# EAGLE board EBook READER v7 - PCB (EAGLE 9.7.0)
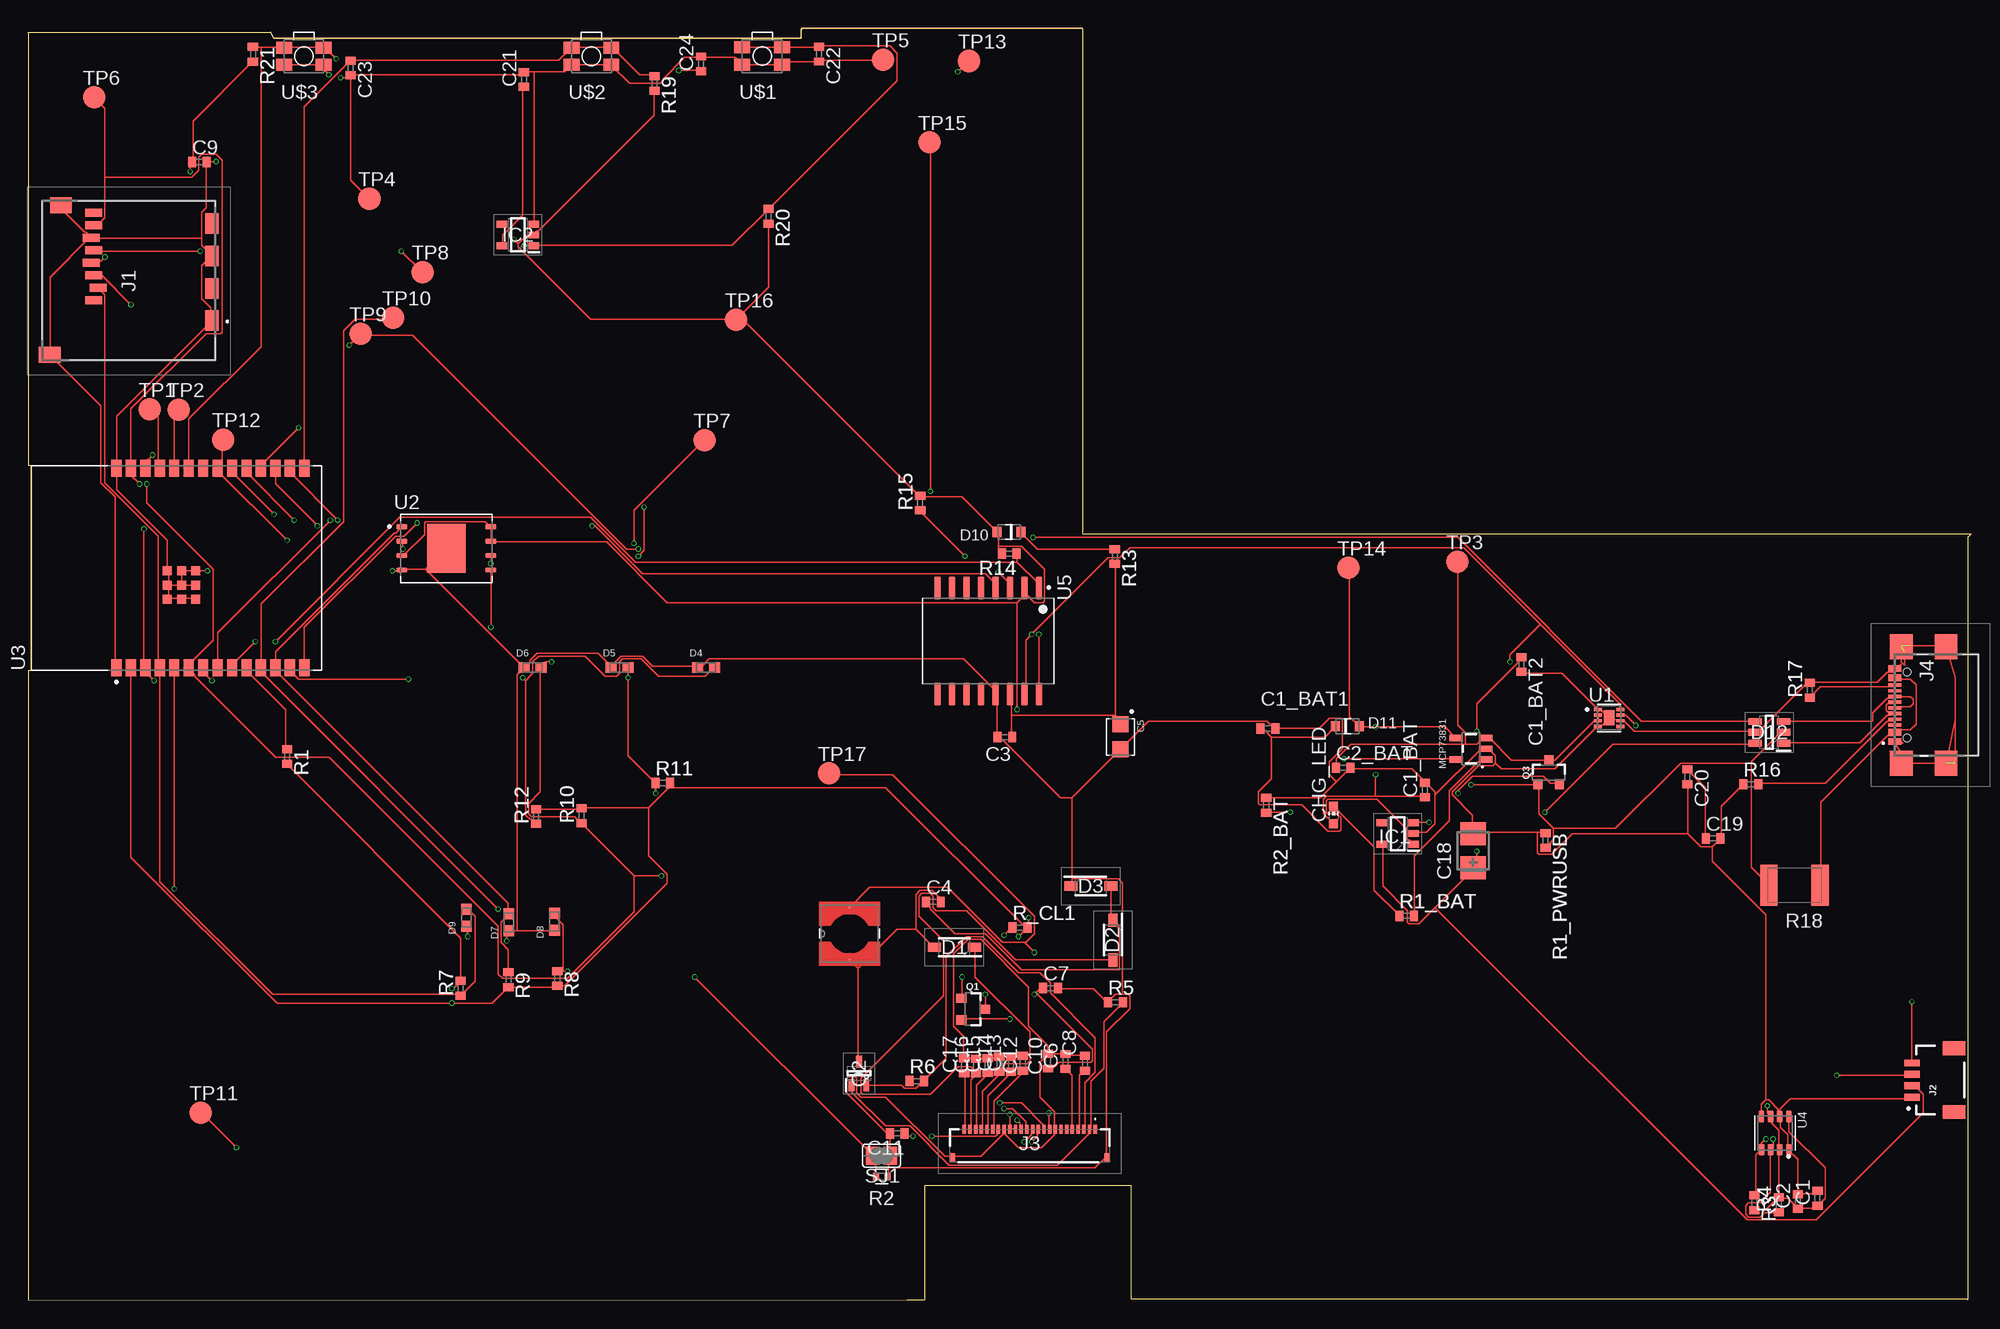
[diagram p0: board, top side]
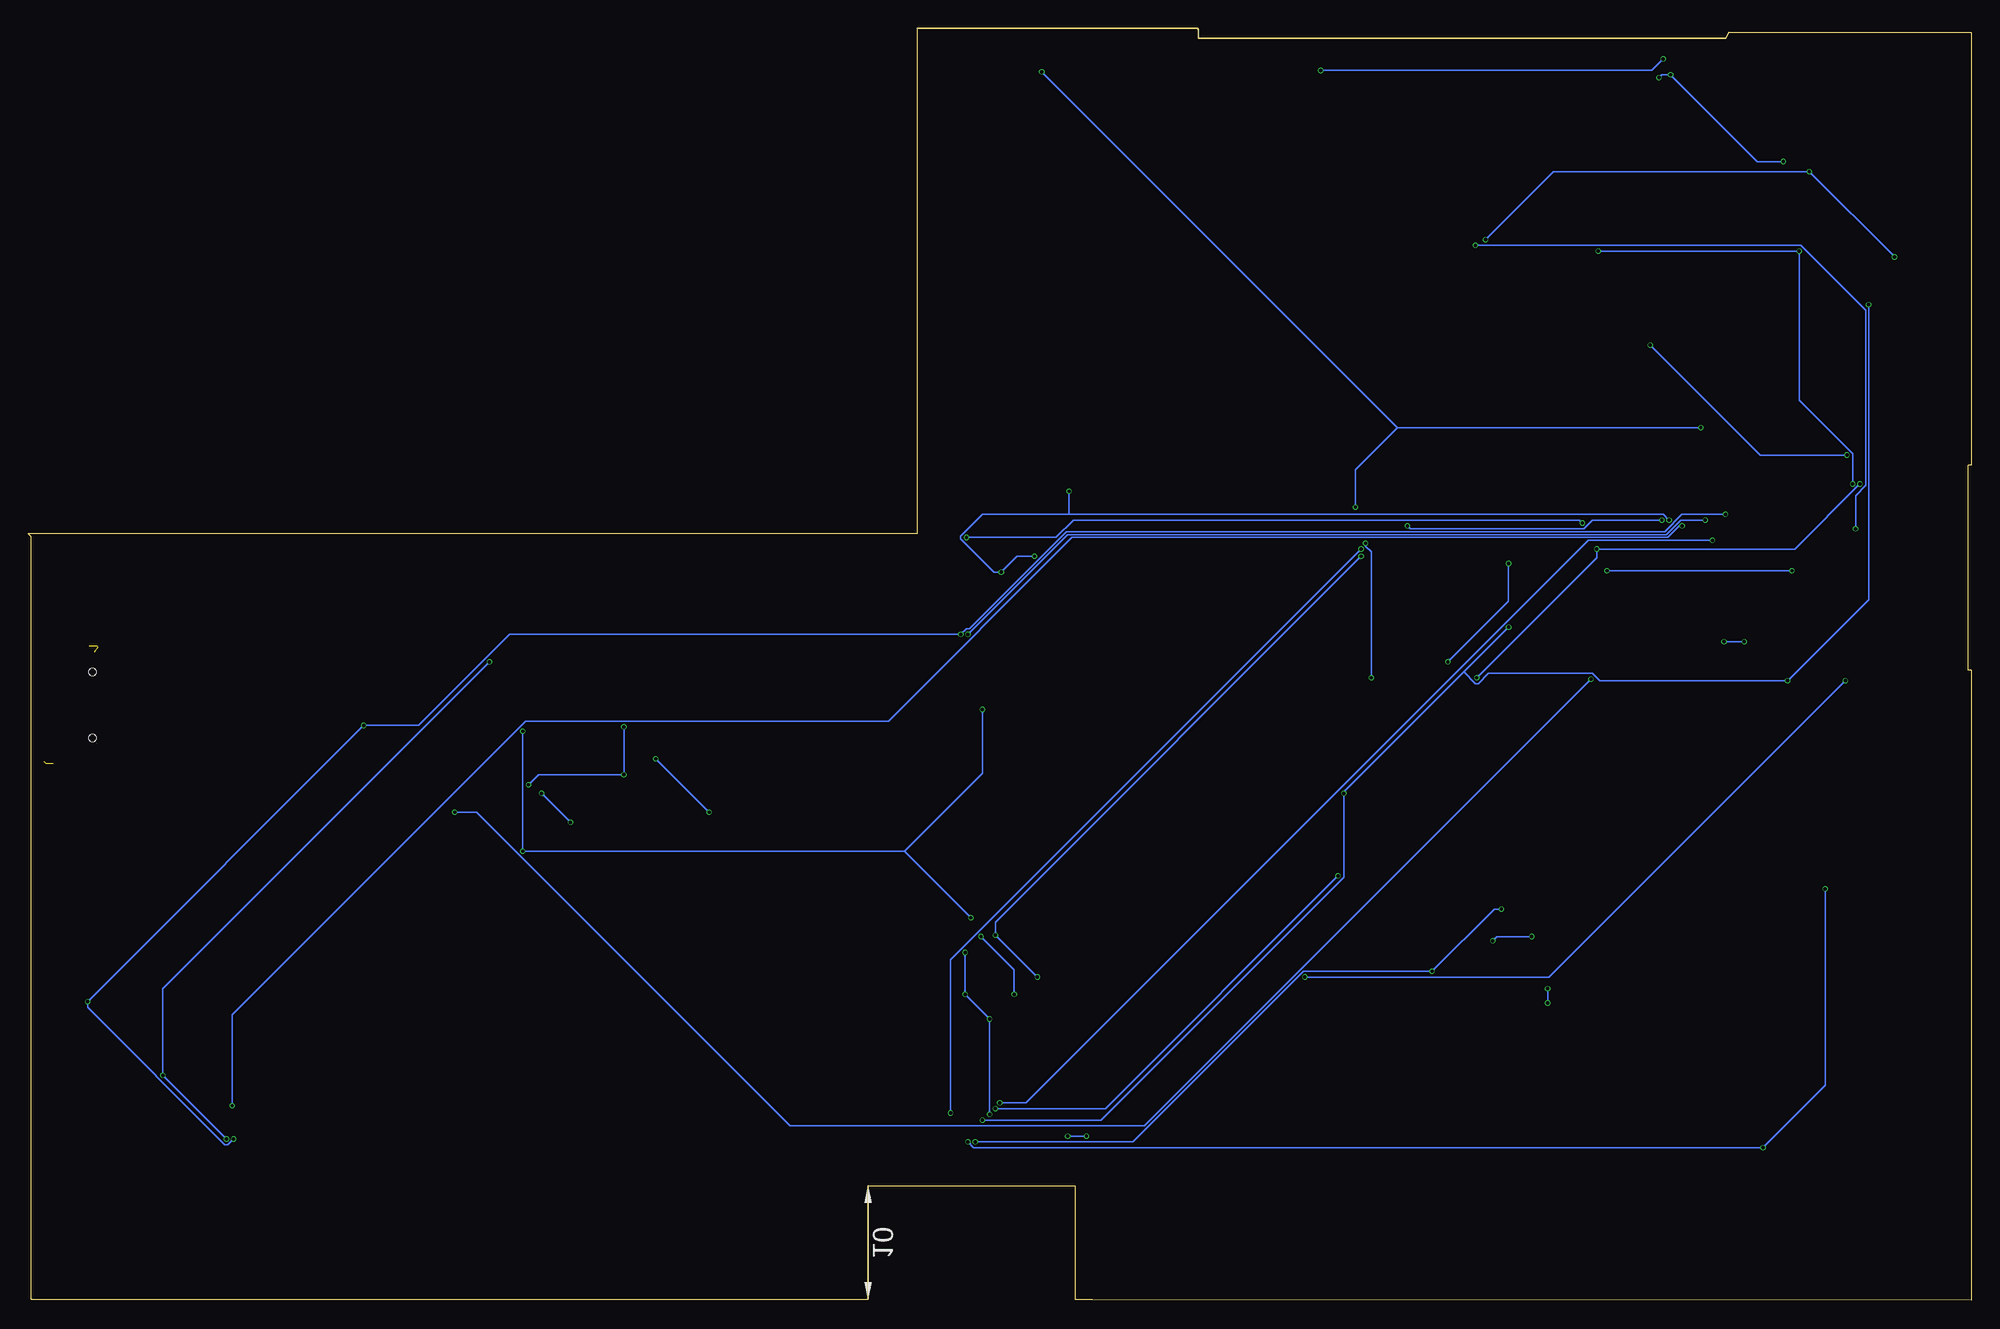
[diagram p1: board, bottom side, seen from below]

Size 170.67 x 111.69 mm. Coordinates in mm from the lower left corner, seen from the top.
Outline: 78.71,0.02 77.2,0.02 0,0 0,55.34 0.26,55.34 0.26,73.32 0,73.32 0,111.32 21.29,111.37 21.56,110.82 67.86,110.82 67.86,111.58 67.97,111.69 92.62,111.69 92.62,67.31 170.67,67.31 170.4,67.05 170.4,0.05
Outline: 170.38,0.03 170.4,0.05
Outline: 170.4,0.05 96.92,0.05 96.92,10.06 78.72,10.06 78.72,0.03
Copper layers (1*16): Top / Bottom
Stack-up Default Layer Stack: Top User Defined 0.035mm / Dielectric-1 User Defined 1.6mm / Bottom User Defined 0.035mm
Design rules: minimum copper width 5mil, minimum drill size 0.3mm, copper clearance wire_polygon to wire_polygon 5mil, copper clearance wire_polygon to pad_smd 5mil, copper clearance wire_polygon to via 5mil, copper clearance pad_smd to pad_smd 5mil, copper clearance pad_smd to via 5mil, copper clearance via to via 5mil, copper clearance smd to pad (same net) 5mil, copper clearance smd to via (same net) 5mil, copper clearance smd to smd (same net) 5mil, dimension clearance 0.2mm, via restrict clearance 0mil, restrict clearance 0mil, drill distance 6mil, keepout clearance 0mil

## Footprints (pad centres in the part's own frame; a part is rotated, then mirrored left to right if it is on the bottom)
ESP32_WROVER_EAGLE-LTSPICE_C0402 = smd 0.7 x 0.9: 1 -0.65,0; 2 0.65,0
EAGLE-LTSPICE_C0402 = smd 0.7 x 0.9: 1 -0.65,0; 2 0.65,0
CAPCP3225X100N = smd 1.4 x 1.4: 1 -1.1,0; 2 1.1,0
RCL_CT3528 = smd 2 x 2.2: + -1.5,0; - 1.5,0
ADAFRUIT_CHIP-LED0603 = smd 0.8 x 0.8: A 0,-0.75; C 0,0.75
SOD3716X135N = smd 1.15 x 0.8: 1 -1.75,0; 2 1.75,0
DIOC1608X36N = smd 0.97 x 0.94: 1 -0.75,0; 2 0.75,0
ESP32_WROVER_AVX---SD0805S020S1R0_AVX_SD0805S020S1R0_0 = smd 0.8 x 0.9: 1 -1.05,0; 2 1.05,0
SOT95P280X145-6N = smd 1.2 x 0.6: 1 -1.25,0.95; 2 -1.25,0; 3 -1.25,-0.95; 4 1.25,-0.95; 5 1.25,0; 6 1.25,0.95
SOT95P280X120-5N = smd 0.9 x 0.6: 1 -1.4,0.95; 2 -1.4,0; 3 -1.4,-0.95; 4 1.4,-0.95; 5 1.4,0.95
SOT95P280X125-5N = smd 0.9 x 0.6: 1 -1.4,0.95; 2 -1.4,0; 3 -1.4,-0.95; 4 1.4,-0.95; 5 1.4,0.95
112ATAARR03ATTEND = smd 1.8 x 1.2: G1 10.6,10.4; G2 4.9,10.4; S1 7.75,10.4; S2 2.05,10.4 | smd 1.4 x 1.9: G3 13.6,-3.85; G4 0.45,-2.85 | smd 0.7 x 1.5: P1 8.8,0; P2 7.7,0.4; P3 6.6,0; P4 5.5,-0.2; P5 4.4,0; P6 3.3,-0.2; P7 2.2,0; P8 1.1,0
JST04_1MM_RA = smd 0.6 x 1.35: 1 -1.5,0; 2 -0.5,0; 3 0.5,0; 4 1.5,0 | smd 1.2 x 2: NC1 2.8,-3.675; NC2 -2.8,-3.675
FH34SRJ24S05SH99 = smd 0.3 x 0.8: 1 5.75,1.45; 2 5.25,1.45; 3 4.75,1.45; 4 4.25,1.45; 5 3.75,1.45; 6 3.25,1.45; 7 2.75,1.45; 8 2.25,1.45; 9 1.75,1.45; 10 1.25,1.45; 11 0.75,1.45; 12 0.25,1.45; 13 -0.25,1.45; 14 -0.75,1.45; 15 -1.25,1.45; 16 -1.75,1.45; 17 -2.25,1.45; 18 -2.75,1.45; 19 -3.25,1.45; 20 -3.75,1.45; 21 -4.25,1.45; 22 -4.75,1.45; 23 -5.25,1.45; 24 -5.75,1.45 | smd 0.4 x 0.8: MP1 6.75,-1.05; MP2 -6.75,-1.05
SAMACSYS_PARTS_USB4110GFA = smd 0.3 x 1.15: A1 -3.35,3.678; A4 -2.55,3.678; A5 -1.25,3.678; A6 -0.25,3.678; A7 0.25,3.678; A8 1.25,3.678; A9 2.55,3.678; A12 3.35,3.678; B1 3.05,3.678; B4 2.25,3.678; B5 1.75,3.678; B6 0.75,3.678; B7 -0.75,3.678; B8 -1.75,3.678; B9 -2.25,3.678; B12 -3.05,3.678 | smd 2.18 x 2: MP1 -5.11,-0.827; MP2 5.11,-0.827; MP3 -5.11,3.103; MP4 5.11,3.103 | hole 0.65: -2.89,2.603; 2.89,2.603
IND_4828-WE-TPC_WRE = smd 0.127 x 0.127: 1 -2.286,0; 2 2.286,0
ESP32_WROVER_SPARKFUN-IC-POWER_SOT23-5 = smd 0.55 x 1.2: 1 -0.95,-1.3; 2 0,-1.3; 3 0.95,-1.3; 4 0.95,1.3; 5 -0.95,1.3
ESP32_WROVER_SPARKFUN-DISCRETESEMI_SOT23-3 = smd 0.8 x 0.9: 1 -0.95,-1; 2 0.95,-1; 3 0,1.1
SOT65P210X110-3N = smd 1.05 x 0.5: 1 -1.05,0.65; 2 -1.05,-0.65; 3 1.05,0
ESP32_WROVER_EAGLE-LTSPICE_R0402 = smd 0.7 x 0.9: 1 -0.65,0; 2 0.65,0
RESC1005X40 = smd 0.535 x 0.644: 1 -0.507,0; 2 0.507,0
ESP32C6_VARISTOR_CT/CN1812 = smd 1.5 x 3.6: 1 -2.25,0; 2 2.25,0
SJ = smd 1.168 x 1.6: 1 -0.762,0; 2 0.762,0
TP20R = smd 2 x 2: TP 0,0
SON50P200X200X80-9N = smd 0.76 x 0.27: 1 -0.985,0.75; 2 -0.985,0.25; 3 -0.985,-0.25; 4 -0.985,-0.75; 5 0.985,-0.75; 6 0.985,-0.25; 7 0.985,0.25; 8 0.985,0.75 | smd 0.9 x 1.3: 9 0,0
SON127P600X800X80-9N = smd 0.94 x 0.44: 1 -3.895,1.905; 2 -3.895,0.635; 3 -3.895,-0.635; 4 -3.895,-1.905; 5 3.895,-1.905; 6 3.895,-0.635; 7 3.895,0.635; 8 3.895,1.905 | smd 3.4 x 4.3: 9 0,0
XCVR_ESP32-C6-WROOM-1-N8 = smd 1.5 x 0.9: 1 -8.75,5.26; 2 -8.75,3.99; 3 -8.75,2.72; 4 -8.75,1.45; 5 -8.75,0.18; 6 -8.75,-1.09; 7 -8.75,-2.36; 8 -8.75,-3.63; 9 -8.75,-4.9; 10 -8.75,-6.17; 11 -8.75,-7.44; 12 -8.75,-8.71; 13 -8.75,-9.98; 14 -8.75,-11.25; 15 8.75,-11.25; 16 8.75,-9.98; 17 8.75,-8.71; 18 8.75,-7.44; 19 8.75,-6.17; 20 8.75,-4.9; 21 8.75,-3.63; 22 8.75,-2.36; 23 8.75,-1.09; 24 8.75,0.18; 25 8.75,1.45; 26 8.75,2.72; 27 8.75,3.99; 28 8.75,5.26 | smd 0.8 x 0.8: 29_1 -2.755,0.79; 29_2 -1.505,0.79; 29_3 -0.255,0.79; 29_4 -2.755,-0.46; 29_5 -1.505,-0.46; 29_6 -0.255,-0.46; 29_7 -2.755,-1.71; 29_8 -1.505,-1.71; 29_9 -0.255,-1.71
ESP32_WROVER_BME680_PSON80P300X300X100-8N = smd 1.016 x 0.5: 1 1.458,1.2; 2 1.458,0.4; 3 1.458,-0.4; 4 1.458,-1.2; 5 -1.458,-1.22; 6 -1.458,-0.4; 7 -1.458,0.4; 8 -1.458,1.2
SOIC127P1032X265-16N = smd 2.05 x 0.59: 1 -4.655,4.445; 2 -4.655,3.175; 3 -4.655,1.905; 4 -4.655,0.635; 5 -4.655,-0.635; 6 -4.655,-1.905; 7 -4.655,-3.175; 8 -4.655,-4.445; 9 4.655,-4.445; 10 4.655,-3.175; 11 4.655,-1.905; 12 4.655,-0.635; 13 4.655,0.635; 14 4.655,1.905; 15 4.655,3.175; 16 4.655,4.445
MYBUTTON = smd 1.4 x 1.05: 1 1.75,0.75; 2 -1.75,0.75; 3 -1.75,-0.75; 4 1.75,-0.75

## Placement (x,y rotation side)
C1  [ESP32_WROVER_EAGLE-LTSPICE_C0402]  157.18,8.95 90 top
C1_BAT  4.7uF  [ESP32_WROVER_EAGLE-LTSPICE_C0402]  122.69,44.8 90 top
C1_BAT1  4.7uF  [ESP32_WROVER_EAGLE-LTSPICE_C0402]  108.89,50.2 0 top
C1_BAT2  4.7uF  [ESP32_WROVER_EAGLE-LTSPICE_C0402]  131.16,55.82 270 top
C2  [ESP32_WROVER_EAGLE-LTSPICE_C0402]  155.45,8.66 90 top
C2_BAT  4.7uF  [ESP32_WROVER_EAGLE-LTSPICE_C0402]  115.51,46.76 0 top
C3  [EAGLE-LTSPICE_C0402]  85.78,49.45 180 top
C4  4.7uF/25V  [EAGLE-LTSPICE_C0402]  79.5,34.97 0 top
C5  CPH3225A  [CAPCP3225X100N]  95.94,49.46 270 top
C6  1uF/50V  [ESP32_WROVER_EAGLE-LTSPICE_C0402]  91.1,20.96 90 top
C7  10uF  [EAGLE-LTSPICE_C0402]  89.79,27.4 0 top
C8  1uF/50V  [ESP32_WROVER_EAGLE-LTSPICE_C0402]  92.81,20.81 90 top
C9  100nF  [EAGLE-LTSPICE_C0402]  15.02,99.96 0 top
C10  0.1uF/50V  [ESP32_WROVER_EAGLE-LTSPICE_C0402]  89.57,20.99 90 top
C11  1uF/50V  [ESP32_WROVER_EAGLE-LTSPICE_C0402]  76.33,14.64 180 top
C12  1uF/50V  [ESP32_WROVER_EAGLE-LTSPICE_C0402]  87.35,20.81 90 top
C13  1uF/50V  [ESP32_WROVER_EAGLE-LTSPICE_C0402]  86.32,20.7 90 top
C14  1uF/50V  [ESP32_WROVER_EAGLE-LTSPICE_C0402]  85.3,20.72 90 top
C15  1uF/50V  [ESP32_WROVER_EAGLE-LTSPICE_C0402]  84.27,20.61 90 top
C16  1uF/50V  [ESP32_WROVER_EAGLE-LTSPICE_C0402]  83.24,20.56 90 top
C17  1uF/50V  [ESP32_WROVER_EAGLE-LTSPICE_C0402]  82.22,20.58 90 top
C18  100uF  [RCL_CT3528]  126.92,39.46 90 top
C19  100nF  [ESP32_WROVER_EAGLE-LTSPICE_C0402]  148.01,40.55 0 top
C20  4.7uF  [ESP32_WROVER_EAGLE-LTSPICE_C0402]  145.75,45.96 270 top
C21  100nF  [ESP32_WROVER_EAGLE-LTSPICE_C0402]  43.53,107.2 90 top
C22  1uF  [ESP32_WROVER_EAGLE-LTSPICE_C0402]  69.45,109.44 270 top
C23  100nF  [ESP32_WROVER_EAGLE-LTSPICE_C0402]  28.3,108.22 270 top
C24  100nF  [ESP32_WROVER_EAGLE-LTSPICE_C0402]  59.08,108.58 90 top
CHG_LED  [ADAFRUIT_CHIP-LED0603]  114.66,42.6 0 top
D1  MBR0530  [SOD3716X135N]  81.35,30.99 180 top
D2  MBR0530  [SOD3716X135N]  95.27,31.62 270 top
D3  MBR0530  [SOD3716X135N]  93.34,36.36 0 top
D4  PGB1010603MR  [DIOC1608X36N]  59.54,55.57 0 top
D5  PGB1010603MR  [DIOC1608X36N]  51.92,55.57 0 top
D6  PGB1010603MR  [DIOC1608X36N]  44.3,55.57 0 top
D7  PGB1010603MR  [DIOC1608X36N]  42.2,33.17 90 top
D8  PGB1010603MR  [DIOC1608X36N]  46.22,33.22 90 top
D9  PGB1010603MR  [DIOC1608X36N]  38.48,33.6 90 top
D10  ESP32_WROVER_AVX---SD0805S020S1R0_AVX_SD0805S020S1R0_0_0AVX_SD0805S020S1R0_0_0  [ESP32_WROVER_AVX---SD0805S020S1R0_AVX_SD0805S020S1R0_0]  86.16,67.47 180 top
D11  ESP32_WROVER_AVX---SD0805S020S1R0_AVX_SD0805S020S1R0_0_0AVX_SD0805S020S1R0_0_0  [ESP32_WROVER_AVX---SD0805S020S1R0_AVX_SD0805S020S1R0_0]  115.88,50.41 0 top
D12  USBLC6-2SC6Y  [SOT95P280X145-6N]  152.94,49.87 180 top
IC1  XC6220A331MR-G  [SOT95P280X120-5N]  120.29,40.97 180 top
IC2  BD5229G-TR  [SOT95P280X125-5N]  42.99,93.55 180 top
J1  112A-TAAR-R03_ATTEND  [112ATAARR03ATTEND]  5.72,96.62 270 top
J2  QWIIC_RIGHT_ANGLE  [JST04_1MM_RA]  165.49,19.32 90 top
J3  FH34SRJ-24S-0.5SH_99_  [FH34SRJ24S05SH99]  87.97,13.55 0 top
J4  SAMACSYS_PARTS_USB4110-GF-A  [SAMACSYS_PARTS_USB4110GFA]  167.64,52.27 90 top
L1  68uH  [IND_4828-WE-TPC_WRE]  72.14,32.18 90 top
MCP73831  ESP32_WROVER_SPARKFUN-IC-POWER_MCP73831  [ESP32_WROVER_SPARKFUN-IC-POWER_SOT23-5]  126.73,48.42 90 top
Q1  20V/4.2A/52mΩ/1.4W  [ESP32_WROVER_SPARKFUN-DISCRETESEMI_SOT23-3]  82.94,25.55 270 top
Q2  SI1308EDL-T1-GE3  [SOT65P210X110-3N]  72.97,19.9 90 top
Q3  20V/4.2A/52mΩ/1.4W  [ESP32_WROVER_SPARKFUN-DISCRETESEMI_SOT23-3]  133.56,46.32 0 top
R1  [ESP32_WROVER_EAGLE-LTSPICE_R0402]  22.72,47.74 270 top
R1_BAT  200  [ESP32_WROVER_EAGLE-LTSPICE_R0402]  121.08,33.74 0 top
R1_PWRUSB  100K  [ESP32_WROVER_EAGLE-LTSPICE_R0402]  133.28,40.37 270 top
R2  2.2  [RESC1005X40]  74.95,10.84 180 top
R2_BAT  2K  [ESP32_WROVER_EAGLE-LTSPICE_R0402]  108.74,43.47 270 top
R3  [ESP32_WROVER_EAGLE-LTSPICE_R0402]  151.63,8.54 270 top
R4  [ESP32_WROVER_EAGLE-LTSPICE_R0402]  153.77,8.37 90 top
R5  10K  [ESP32_WROVER_EAGLE-LTSPICE_R0402]  95.5,26.15 0 top
R6  0.47  [ESP32_WROVER_EAGLE-LTSPICE_R0402]  78.05,19.24 0 top
R7  10K  [ESP32_WROVER_EAGLE-LTSPICE_R0402]  37.98,27.38 90 top
R8  10K  [ESP32_WROVER_EAGLE-LTSPICE_R0402]  46.47,28.24 270 top
R9  10K  [ESP32_WROVER_EAGLE-LTSPICE_R0402]  42.17,28.14 270 top
R10  10K  [ESP32_WROVER_EAGLE-LTSPICE_R0402]  48.6,42.53 90 top
R11  10K  [ESP32_WROVER_EAGLE-LTSPICE_R0402]  55.73,45.41 0 top
R12  10K  [ESP32_WROVER_EAGLE-LTSPICE_R0402]  44.61,42.48 90 top
R13  [ESP32_WROVER_EAGLE-LTSPICE_R0402]  95.44,65.31 270 top
R14  [ESP32_WROVER_EAGLE-LTSPICE_R0402]  86.16,65.56 180 top
R15  [ESP32_WROVER_EAGLE-LTSPICE_R0402]  78.34,70 90 top
R16  5k1  [ESP32_WROVER_EAGLE-LTSPICE_R0402]  151.31,45.3 0 top
R17  5k1  [ESP32_WROVER_EAGLE-LTSPICE_R0402]  156.5,53.57 90 top
R18  ESP32C6_VARISTORCN1812  [ESP32C6_VARISTOR_CT/CN1812]  155.15,36.44 180 top
R19  10K  [ESP32_WROVER_EAGLE-LTSPICE_R0402]  55,106.86 270 top
R20  10K  [ESP32_WROVER_EAGLE-LTSPICE_R0402]  65.01,95.19 270 top
R21  10K  [ESP32_WROVER_EAGLE-LTSPICE_R0402]  19.73,109.43 270 top
R_CL1  10K  [ESP32_WROVER_EAGLE-LTSPICE_R0402]  87.1,32.71 0 top
SJ1  [SJ]  74.94,12.69 180 top
TP1  TPTP20R  [TP20R]  10.66,78.23 0 top
TP2  TPTP20R  [TP20R]  13.18,78.22 0 top
TP3  TPTP20R  [TP20R]  125.53,64.85 0 top
TP4  TPTP20R  [TP20R]  29.95,96.74 0 top
TP5  TPTP20R  [TP20R]  75.1,108.94 0 top
TP6  TPTP20R  [TP20R]  5.77,105.64 0 top
TP7  TPTP20R  [TP20R]  59.41,75.53 0 top
TP8  TPTP20R  [TP20R]  34.65,90.3 0 top
TP9  TPTP20R  [TP20R]  29.18,84.87 0 top
TP10  TPTP20R  [TP20R]  32.05,86.28 0 top
TP11  TPTP20R  [TP20R]  15.13,16.47 0 top
TP12  TPTP20R  [TP20R]  17.11,75.58 0 top
TP13  TPTP20R  [TP20R]  82.64,108.83 0 top
TP14  TPTP20R  [TP20R]  115.98,64.31 0 top
TP15  TPTP20R  [TP20R]  79.15,101.68 0 top
TP16  TPTP20R  [TP20R]  62.16,86.09 0 top
TP17  TPTP20R  [TP20R]  70.33,46.26 0 top
U1  MAX17048G+T10  [SON50P200X200X80-9N]  138.87,51.13 0 top
U2  W25Q512JVEIQ  [SON127P600X800X80-9N]  36.72,66.02 0 top
U3  ESP32-C6-WROOM-1-N8  [XCVR_ESP32-C6-WROOM-1-N8]  12.99,64.3 90 top
U4  ESP32_WROVER_BME680_BME680  [ESP32_WROVER_BME680_PSON80P300X300X100-8N]  153.45,14.67 270 top
U5  DS3231SN#  [SOIC127P1032X265-16N]  84.33,57.88 270 top
U$1  BUTTON_CUSYOMV1  [MYBUTTON]  64.46,109.27 180 top
U$2  BUTTON_CUSYOMV1  [MYBUTTON]  49.46,109.26 180 top
U$3  BUTTON_CUSYOMV1  [MYBUTTON]  24.2,109.26 180 top

## Library data of the parts
C1 C1_BAT C1_BAT1 C1_BAT2 C2 C2_BAT C3 C4 C6-C17 C19-C24 = DeskAssistant v19 v1; SPICEMODEL: NONE; SPICEPREFIX: C
C5 = DeskAssistant v19 v1; AVAILABILITY: Not in stock; CHECK_PRICES: https://www.snapeda.com/parts/CPH3225A/Seiko+Instruments/view-part/?ref=eda; DESCRIPTION: 11 mF (EDLC) Supercapacitor 3.3 V 1210 (3225 Metric) - -; MF: Seiko Instruments; MP: CPH3225A; PACKAGE: 1210 Seiko; PRICE: None; PURCHASE-URL: https://www.snapeda.com/api/url_track_click_mouser/?unipart_id=562593&manufacturer=Seiko Instruments&part_name=CPH3225A&search_term=None; SNAPEDA_LINK: https://www.snapeda.com/parts/CPH3225A/Seiko+Instruments/view-part/?ref=snap
C18 = DeskAssistant v19 v1; SPICEPREFIX: C
CHG_LED R18 TP1-TP17 U$1-U$3 = DeskAssistant v19 v1
D1-D3 = DeskAssistant v19 v1; AVAILABILITY: In Stock; CHECK_PRICES: https://www.snapeda.com/parts/MBR0530/Onsemi/view-part/?ref=eda; DESCRIPTION: Diode Schottky 30 V 500mA Surface Mount SOD-123; MF: ON Semiconductor; MP: MBR0530; PACKAGE: SOD-123-2 ON Semiconductor; PRICE: None; PURCHASE-URL: https://www.snapeda.com/api/url_track_click_mouser/?unipart_id=179458&manufacturer=ON Semiconductor&part_name=MBR0530&search_term=None; SNAPEDA_LINK: https://www.snapeda.com/parts/MBR0530/Onsemi/view-part/?ref=snap
D4-D9 = DeskAssistant v19 v1; AVAILABILITY: In Stock; CHECK_PRICES: https://www.snapeda.com/parts/PGB1010603MR/Littelfuse/view-part/?ref=eda; DESCRIPTION: 150V (Typ) Clamp - Ipp Tvs Diode Surface Mount 0603 (1608 Metric); MF: Littelfuse Inc.; MP: PGB1010603MR; PACKAGE: 0603 Littelfuse Inc.; PRICE: None; PURCHASE-URL: https://www.snapeda.com/api/url_track_click_mouser/?unipart_id=5659453&manufacturer=Littelfuse Inc.&part_name=PGB1010603MR&search_term=None; SNAPEDA_LINK: https://www.snapeda.com/parts/PGB1010603MR/Littelfuse/view-part/?ref=snap
D10 D11 = DeskAssistant v19 v1; CENTROID_NOT_SPECIFIED: No; DATASHEET: http://datasheets.avx.com/schottky.pdf; DIGIKEY_DESCRIPTION: DIODE SCHOTTKY 20V 1A 0805; DIGIKEY_PART_NUMBER: 478-7800-1-ND; LEAD_FREE: yes; MF: AVX; MOUSER_PART_NUMBER: 581-SD0805S020S1R0; PACKAGE: 0805 (2012 metric); PREFIX: D; ROHS: yes; TEMPERATURE_RANGE_HIGH: +125°C; TEMPERATURE_RANGE_LOW: -55°C
D12 = DeskAssistant v19 v1; AVAILABILITY: In Stock; CHECK_PRICES: https://www.snapeda.com/parts/USBLC6-2SC6Y/STMicroelectronics/view-part/?ref=eda; DESCRIPTION: 17V Clamp 5A (8/20µs) Ipp Tvs Diode Surface Mount SOT-23-6; MF: STMicroelectronics; MP: USBLC6-2SC6Y; PACKAGE: SOT-23-6 STMicroelectronics; PRICE: None; SNAPEDA_LINK: https://www.snapeda.com/parts/USBLC6-2SC6Y/STMicroelectronics/view-part/?ref=snap
IC1 = DeskAssistant v19 v1; DESCRIPTION: LDO Voltage Regulators; HEIGHT: 1.2mm; MANUFACTURER_NAME: Torex; MANUFACTURER_PART_NUMBER: XC6220A331MR-G; MOUSER_PART_NUMBER: 865-XC6220A331MR-G; MOUSER_PRICE-STOCK: https://www.mouser.co.uk/ProductDetail/Torex-Semiconductor/XC6220A331MR-G?qs=AsjdqWjXhJ8ZSWznL1J0gg%3D%3D
IC2 = DeskAssistant v19 v1; DESCRIPTION: Voltage Detector with Adjustable Delay Time: CMOS processes are utilized to develop high precision, low current consumption CMOS reset ICs that allow arbitrary setting of the delay time. The extensive lineup includes both Nch Open Drain and CMOS output types in a wide range of detection voltages (from 2.3V to 6.0V, in 0.1V steps), enabling selection of the ideal solution based on customer requirements. In addition, the entire series is of course both lead-free and RoHS-compliant.; HEIGHT: 1.25mm; MANUFACTURER_NAME: ROHM Semiconductor; MANUFACTURER_PART_NUMBER: BD5229G-TR; MOUSER_PART_NUMBER: 755-BD5229G-TR; MOUSER_PRICE-STOCK: https://www.mouser.co.uk/ProductDetail/ROHM-Semiconductor/BD5229G-TR?qs=4kLU8WoGk0vvnhrrYwdszw%3D%3D
J1 = DeskAssistant v19 v1; DESCRIPTION: Micro SD Card Socket, Push-Push Type, Top Mount, SMT, H=1.83mm, 10u; HEIGHT: 1.9mm; MANUFACTURER_NAME: ATTEND; MANUFACTURER_PART_NUMBER: 112A-TAAR-R03 ATTEND
J2 = DeskAssistant v19 v1; PROD_ID: CONN-13694
J3 = DeskAssistant v19 v1; DESCRIPTION: 24 Position FFC, FPC Connector Contacts, Top and Bottom 0.020" (0.50mm) Surface Mount, Right Angle; HEIGHT: 1.1mm; MANUFACTURER_NAME: Hirose; MANUFACTURER_PART_NUMBER: FH34SRJ-24S-0.5SH(99); MOUSER_PART_NUMBER: 798-FH34SRJ24S05SH99; MOUSER_PRICE-STOCK: https://www.mouser.co.uk/ProductDetail/Hirose-Connector/FH34SRJ-24S-0.5SH99?qs=vcbW%252B4%252BSTIpKBl5ap9J8Fw%3D%3D
J4 = DeskAssistant v19 v1; DESCRIPTION: CONN USB 2.0 TYPE-C R/A SMT; HEIGHT: 3.26mm; MANUFACTURER_NAME: GCT (GLOBAL CONNECTOR TECHNOLOGY); MANUFACTURER_PART_NUMBER: USB4110-GF-A; MOUSER_PART_NUMBER: 640-USB4110-GF-A; MOUSER_PRICE-STOCK: https://www.mouser.co.uk/ProductDetail/GCT/USB4110-GF-A?qs=KUoIvG%2F9IlYiZvIXQjyJeA%3D%3D
L1 = DeskAssistant v19 v1; COPYRIGHT: Copyright (C) 2024 Ultra Librarian. All rights reserved.; MANUFACTURER_PART_NUMBER: 744043680; MFR_NAME: Wurth Electronics
MCP73831 = DeskAssistant v19 v1; PROD_ID: IC-09995
Q1 Q3 = DeskAssistant v19 v1; PROD_ID: TRAN-14388
Q2 = DeskAssistant v19 v1; AVAILABILITY: In Stock; CHECK_PRICES: https://www.snapeda.com/parts/SI1308EDL-T1-GE3/Vishay+Siliconix/view-part/?ref=eda; DESCRIPTION: Si1308EDL-T1-GE3 N-channel MOSFET Transistor, 1.5 A, 30 V, 3-Pin SC-70 | Siliconix / Vishay SI1308EDL-T1-GE3; MF: Vishay Siliconix; MP: SI1308EDL-T1-GE3; PACKAGE: SOT-323 Vishay Semiconductor; PRICE: None; PURCHASE-URL: https://www.snapeda.com/api/url_track_click_mouser/?unipart_id=274603&manufacturer=Vishay Siliconix&part_name=SI1308EDL-T1-GE3&search_term=None; SNAPEDA_LINK: https://www.snapeda.com/parts/SI1308EDL-T1-GE3/Vishay+Siliconix/view-part/?ref=snap
R1 R1_BAT R1_PWRUSB R2_BAT R3-R17 R19-R21 R_CL1 = DeskAssistant v19 v1; SPICEMODEL: NONE; SPICEPREFIX: R
R2 = Resistor; CATEGORY: Resistors; DESCRIPTION: Chip Resistor 1.05 X 0.54 X 0.40 mm body 0402(1005-METRIC) Package; PACKAGE_SIZE: 0402; PACKAGE_TYPE: SMD
SJ1 = jumper
U1 = DeskAssistant v19 v1; AVAILABILITY: In Stock; CHECK_PRICES: https://www.snapeda.com/parts/MAX17048G+T10/Analog+Devices/view-part/?ref=eda; DESCRIPTION: 3µA 1-Cell/2-Cell Fuel Gauge with ModelGauge; MF: Analog Devices; MP: MAX17048G+T10; PACKAGE: TDFN-8 Maxim; PRICE: None; PURCHASE-URL: https://www.snapeda.com/api/url_track_click_mouser/?unipart_id=329239&manufacturer=Analog Devices&part_name=MAX17048G+T10&search_term=None; SNAPEDA_LINK: https://www.snapeda.com/parts/MAX17048G+T10/Analog+Devices/view-part/?ref=snap
U2 = DeskAssistant v19 v1; AVAILABILITY: In Stock; CHECK_PRICES: https://www.snapeda.com/parts/W25Q512JVEIQ/Winbond+Electronics/view-part/?ref=eda; DESCRIPTION: FLASH - NOR Memory IC 512Mb (64M x 8) SPI - Quad I/O 133 MHz 8-WSON (8x6); MF: Winbond Electronics; MP: W25Q512JVEIQ; PACKAGE: Package; PRICE: None; SNAPEDA_LINK: https://www.snapeda.com/parts/W25Q512JVEIQ/Winbond+Electronics/view-part/?ref=snap
U3 = DeskAssistant v19 v1; AVAILABILITY: In Stock; CHECK_PRICES: https://www.snapeda.com/parts/ESP32-C6-WROOM-1-N8/Espressif+Systems/view-part/?ref=eda; DESCRIPTION: Multiprotocol Modules ESP32-C6 module, Wi-Fi 6 in 2.4 GHz band, Bluetooth 5, Zigbee 3.0 and Thread. ESP34-WROOM Compatible - ENGINEERING SAMPLE; MF: Espressif Systems; MP: ESP32-C6-WROOM-1-N8; PACKAGE: None; PRICE: None; SNAPEDA_LINK: https://www.snapeda.com/parts/ESP32-C6-WROOM-1-N8/Espressif+Systems/view-part/?ref=snap
U4 = DeskAssistant v19 v1; AVAILABILITY: Unavailable; DESCRIPTION: Integrated Environmental Unit; MF: Bosch Sensortec; MP: BME680; PACKAGE: LGA-8 Bosch Tools; PRICE: None
U5 = DeskAssistant v19 v1; AVAILABILITY: In Stock; CHECK_PRICES: https://www.snapeda.com/parts/DS3231SN%23/Analog+Devices/view-part/?ref=eda; DESCRIPTION: Extremely Accurate I²C-Integrated RTC/TCXO/Crystal; MF: Analog Devices; MP: DS3231SN#; PACKAGE: SOIC-16 Maxim; PRICE: None; PURCHASE-URL: https://www.snapeda.com/api/url_track_click_mouser/?unipart_id=99048&manufacturer=Analog Devices&part_name=DS3231SN#&search_term=None; SNAPEDA_LINK: https://www.snapeda.com/parts/DS3231SN%23/Analog+Devices/view-part/?ref=snap

## Nets
3V3: C1_BAT2.1 C9.1 C18.+ D10.2 IC1.5 IC2.2 J1.P4 J2.2 Q1.3 R1.2 R7.2 R8.2 R9.2 R10.2 R11.2 R12.2 R14.2 R15.2 R19.2 R20.2 R21.2 R_CL1.2 TP16.TP U2.3 U2.7 U2.8 U3.2 U5.2
12C_PW: C1.1 C2.1 R3.2 R4.2 U3.17 U4.2 U4.6 U4.8
32KHZ: R14.1 U3.9 U5.1
DN: D12.1 J4.A7 J4.B7
DP: D12.3 J4.A6 J4.B6
EPD_3V3: C7.1 C10.1 J3.15 J3.16 L1.2 Q1.2 TP17.TP
EPD_3V3_C: Q1.1 R_CL1.1 TP13.TP U3.18
EPD_BUSY: J3.9 TP9.TP U3.26
EPD_CS: D8.2 J3.12 R8.1 TP10.TP U3.11
EPD_DC: J3.11 TP11.TP U3.5
EPD_RST: J3.10 TP12.TP U3.21
FLASH_CS: D7.2 R9.1 U2.1 U3.12
GDR: J3.2 Q2.1 R5.2
GND: C1.2 C1_BAT1.2 C1_BAT2.2 C1_BAT.2 C2.2 C2_BAT.2 C3.2 C5.2 C6.2 C7.2 C8.2 C9.2 C10.2 C11.2 C12.2 C13.2 C14.2 C15.2 C16.2 C17.2 C18.- C19.2 C20.2 C21.2 C22.2 C23.2 C24.2 D3.1 D4.1 D5.1 D6.1 D7.1 D8.1 D9.1 D12.5 IC1.2 IC2.3 J1.G1 J1.G2 J1.G3 J1.G4 J1.P6 J2.1 J3.8 J3.17 J3.MP1 J3.MP2 J4.A1 J4.A12 J4.B1 J4.B12 J4.MP1 J4.MP2 J4.MP3 J4.MP4 MCP73831.2 R1_PWRUSB.1 R2.1 R2_BAT.1 R5.1 R16.1 R17.2 SJ1.1 TP4.TP TP5.TP U1.1 U1.4 U1.6 U1.9 U2.4 U2.9 U3.1 U3.28 U3.29_1 U3.29_2 U3.29_3 U3.29_4 U3.29_5 U3.29_6 U3.29_7 U3.29_8 U3.29_9 U4.1 U4.5 U4.7 U5.13 U$1.1 U$1.2 U$2.1 U$2.2 U$3.1 U$3.2
GPIO8: R1.1 U3.10
INT_RTC: R15.1 TP15.TP U3.8 U5.3
IO/BOOT: C23.1 R19.1 U3.15 U$2.3 U$2.4
IO/CHANGE: C24.1 R21.1 U3.23 U$3.3 U$3.4
MISO: D4.2 J1.P7 R12.1 TP6.TP U2.2 U3.27
MOSI: D5.2 J1.P3 J3.14 R11.1 TP7.TP U2.5 U3.7
N$1: C4.1 D2.1 D3.2
N$2: MCP73831.1 R1_BAT.2
N$3: CHG_LED.C R1_BAT.1
N$4: C1_BAT1.1 D11.1 IC1.1 IC1.3 Q3.2
N$5: MCP73831.5 R2_BAT.2
N$6: C17.1 J3.24
N$7: C21.1 IC2.5
N$8: C15.1 J3.22
N$10: C13.1 J3.20
N$11: D10.1 R13.1
N$12: C12.1 J3.19
N$13: C11.1 J3.18
N$20: C6.1 J3.5
N$21: C8.1 J3.4
N$26: J4.A5 R16.2
N$27: C19.1 C20.1
N$28: J4.B5 R17.1
PREVGH: C14.1 D1.1 J3.21
PREVGL: C16.1 D2.2 J3.23
RESE: J3.3 Q2.2 R6.2
RESE': R6.1
RESET: C22.1 IC2.1 R2.2 R20.1 SJ1.2 U3.3 U$1.3 U$1.4
RTC_RST: U3.16 U5.4
RX: TP2.TP U3.24
SCK: D6.2 J1.P5 J3.13 R10.1 TP8.TP U2.6 U3.6
SCL: J2.4 R3.1 U1.7 U3.20 U4.4 U5.16
SDA: J2.3 R4.1 U1.8 U3.19 U4.3 U5.15
SRC: C4.2 D1.2 L1.1 Q2.3
SS_SD: D9.2 J1.P2 R7.1 U3.4
TX: TP1.TP U3.25
USB_D+: D12.4 U3.14
USB_D-: D12.6 U3.13
VBAT: C2_BAT.1 MCP73831.3 Q3.3 TP3.TP U1.2 U1.3
VBUS: C1_BAT.1 CHG_LED.A D11.2 D12.2 MCP73831.4 Q3.1 R1_PWRUSB.2 R18.2 TP14.TP
VRTC: C3.1 C5.1 R13.2 U5.14
VUSB: J4.A4 J4.A9 J4.B4 J4.B9 R18.1

## Tracks (layer width: path | path; a pad name or v marks a point on that pad's centre or on a via)
3V3  (via drill 0.3)
  Top 0.127: R21.2 19.67,108.76 14.47,103.56 14.47,100 C9.1 14.34,99.87 14.21,99.75 v14.21,99.11 | v6.72,91.62 6.34,91.24 5.58,91.24 J1.P4 | R19.2 54.98,106.1 54.98,104.06 44.82,93.9 44.69,93.9 44.44,93.65 IC2.2 44.31,93.52 43.8,93.52 43.04,92.76 | 62.47,86.41 62.22,86.16 TP16.TP | 62.47,86.41 65.01,88.95 65.01,94.41 R20.2 | U2.3 32.88,65.46 33.01,65.46 34.79,67.23 34.79,68.25 34.91,68.38 40.12,68.38 40.5,68 U2.8 40.63,67.87 40.63,66.73 U2.7 40.63,66.6 50.79,66.6 56.12,61.27 86.86,61.27 | 85.2,66.22 85.2,65.84 85.46,65.58 R14.2 | 85.2,66.22 85.2,67.36 D10.2 85.08,67.49 82.03,70.54 78.35,70.54 R15.2 78.22,70.66 62.47,86.41 | 87.62,62.03 87.62,62.41 U5.2 87.62,62.03 | 87.62,62.03 88.38,61.27 89.14,61.27 89.27,61.39 89.27,64.19 87.24,66.22 85.2,66.22 | 87.62,62.03 86.86,61.27 | 62.47,86.41 TP16.TP | 43.04,92.76 43.04,92.51 49.39,86.16 62.09,86.16 TP16.TP | 43.04,92.76 v42.66,93.14 | 123.56,34.47 126.99,37.9 C18.+ 126.99,38.02 127.24,38.28 v127.24,39.42 | 123.56,34.47 122.16,33.07 121.27,33.07 121.15,33.2 121.15,34.21 118.99,36.37 118.99,39.93 IC1.5 | v127.24,49.96 127.24,52.38 131.05,56.19 131.05,56.44 C1_BAT2.1 | 123.56,34.47 150.99,7.04 157.09,7.04 166.48,16.43 166.48,18.07 165.73,18.82 J2.2 | v84.06,26.85 84.06,25.58 Q1.3 | v86.98,31.93 87.74,32.69 R_CL1.2 | R12.2 44.69,43.1 48.5,43.1 R10.2 48.63,43.23 54.47,43.23 | 54.47,43.23 56.25,45.01 | 56.25,45.01 56.38,45.14 56.38,45.39 R11.2 56.25,45.01 | 56.25,45.01 75.3,45.01 87.49,32.82 87.74,32.82 R_CL1.2 | R1.2 22.72,47.04 37.96,31.8 37.96,28.12 R7.2 37.96,27.99 37.33,27.36 v37.2,27.36 | U3.2 9,55.42 9,38.91 21.83,26.09 v37.2,26.09 40.75,26.09 42.15,27.48 R9.2 42.28,27.48 46.47,27.48 R8.2 46.6,27.61 47.1,27.61 56.12,36.63 56.12,37.39 54.47,39.04 54.47,43.23
  Top 0.127: v87.87,33.58 87.87,32.82 R_CL1.2 | v86.86,51.87 86.86,61.27
  Bottom 0.127: v6.72,91.62 v14.21,99.11 36.69,99.11 v42.66,93.14 | v127.24,49.96 v127.24,39.42 93.71,39.42 | v84.06,26.85 84.06,29.01 v86.98,31.93 | v37.2,26.09 v37.2,27.36 | v87.87,33.58 93.71,39.42 | v86.86,51.87 86.86,46.28 93.71,39.42
12C_PW  (via drill 0.3)
  Top 0.127: R3.2 151.75,7.93 152.64,7.93 153.66,8.94 R4.2 | U4.8 154.67,16.05 154.67,14.78 157.85,11.61 157.85,8.94 157.21,8.31 C1.1 157.09,8.18 156.96,8.05 155.56,8.05 C2.1 155.44,8.05 154.55,8.94 153.78,8.94 R4.2 | v25.39,68 21.7,71.68 21.7,72.95 U3.17 | v152.77,17.07 152.77,16.43 153.02,16.18 U4.6 153.15,16.05 153.15,15.55 153.78,14.91 153.78,13.26 U4.2 153.78,13.13 153.78,9.07 R4.2
  Bottom 0.127: v25.39,68 25.64,68 26.66,66.98 78.98,66.98 95.11,50.85 126.99,50.85 152.77,25.07 v152.77,17.07
32KHZ  (via drill 0.3)
  Top 0.127: 86.86,64.82 86.86,65.46 R14.1 | 86.86,64.82 88.76,62.92 U5.1 | v19.93,57.84 17.89,55.8 U3.9 | v21.7,57.84 32.63,68.76 49.39,68.76 53.33,64.82 86.86,64.82
  Bottom 0.127: v21.7,57.84 v19.93,57.84
DN
  Top 0.127: 163.87,51.66 J4.B7 | D12.1 154.29,48.95 160.9,48.95 163.31,51.36 163.56,51.36 163.87,51.66 | 163.87,51.66 163.85,51.68 163.31,51.68 163.2,51.79 163.2,52.24 163.31,52.36 163.8,52.36 J4.A7
DP
  Top 0.127: J4.A6 164.08,52.12 165.34,52.12 165.6,52.38 165.6,52.76 165.34,53.01 163.97,53.01 J4.B6 163.8,52.86 163.31,52.86 162.04,51.59 162.04,50.85 154.29,50.85 D12.3
EPD_3V3  (via drill 0.3)
  Top 0.127: 86.22,15.04 86.6,15.04 J3.15 | v86.22,24.69 82.03,24.69 Q1.2 | 88.51,26.98 89.01,27.48 C7.1 | 88.51,26.98 93.46,22.02 93.46,21.01 93.33,20.88 90.54,20.88 90.03,20.37 89.65,20.37 C10.1 | 88.51,26.98 v88.38,26.85 | v86.22,16.31 86.22,15.04 | 86.22,15.04 J3.16 | 87.49,31.42 85.59,31.42 80.76,36.25 73.9,36.25 72.12,34.47 L1.2 | 87.49,31.42 87.62,31.42 88.38,32.18 88.38,33.71 75.93,46.15 70.35,46.15 TP17.TP | 87.49,31.42 v88.38,30.53
  Bottom 0.127: v86.22,16.31 v86.22,24.69 v88.38,26.85 v88.38,30.53
EPD_3V3_C  (via drill 0.3)
  Top 0.127: v82.03,28.37 82.03,26.59 Q1.1 | v85.71,32.06 86.35,32.69 R_CL1.1 | v23.74,76.63 20.43,73.33 20.43,73.08 U3.18 | v81.65,107.87 82.54,108.76 TP13.TP | v53.58,65.33 54.09,65.84 v54.09,69.65
  Bottom 0.127: v82.03,28.37 v85.71,32.06 85.71,33.2 v53.58,65.33 | 50.41,76.63 v23.74,76.63 | v81.65,107.87 50.41,76.63 | v54.09,69.65 54.09,72.95 50.41,76.63
EPD_BUSY  (via drill 0.3)
  Top 0.127: v89.65,16.43 89.65,15.04 J3.9 | v53.58,65.96 52.57,65.96 33.77,84.76 29.2,84.76 TP9.TP 29.07,84.76 v28.18,83.87 | v10.91,74.22 10.27,73.58 10.27,73.08 U3.26
  Bottom 0.127: v89.65,16.43 89.65,29.9 v53.58,65.96 | v10.91,74.22 18.53,74.22 v28.18,83.87
EPD_CS  (via drill 0.3)
  Top 0.127: TP10.TP 31.99,86.16 28.69,86.16 27.67,85.14 27.67,68.38 20.43,61.14 U3.11 20.43,55.42 20.43,55.17 v41.26,34.34 | v87.49,13.89 88.13,14.53 88.13,14.91 J3.12 | 46.98,28.88 46.6,28.88 R8.1 | 46.98,28.88 v47.36,28.88 | 46.98,28.88 46.98,32.94 46.34,33.58 46.34,33.96 D8.2
  Bottom 0.127: v87.49,13.89 73.65,13.89 58.66,28.88 v47.36,28.88 41.9,34.34 v41.26,34.34
EPD_DC  (via drill 0.3)
  Top 0.127: v88.13,13.89 88.63,14.4 88.63,14.91 J3.11 | v18.28,13.39 15.23,16.43 TP11.TP | v12.81,36.12 12.81,55.42 U3.5
  Bottom 0.127: v88.13,13.89 87.62,13.39 v18.28,13.39 12.81,18.85 v12.81,36.12
EPD_RST  (via drill 0.3)
  Top 0.127: v85.33,17.32 87.24,17.32 89.14,15.42 89.14,15.04 J3.10 | v22.72,66.73 16.5,72.95 U3.21 16.62,73.08 17.01,73.46 17.01,75.49 TP12.TP
  Bottom 0.127: v85.33,17.32 83.05,17.32 33.64,66.73 v22.72,66.73
FLASH_CS
  Top 0.127: R9.1 42.15,28.88 42.15,30.79 41.52,31.42 41.52,33.2 42.15,33.83 D7.2 42.15,33.96 42.15,34.85 21.58,55.42 U3.12 21.7,56.95 32.12,67.36 32.25,67.36 32.75,67.87 U2.1
GDR
  Top 0.127: R5.2 96.13,26.09 94.48,24.44 94.48,20.37 93.33,19.23 93.33,15.04 J3.2 93.21,14.91 93.21,14.66 90.41,11.86 80.89,11.86 77.46,15.29 75.3,15.29 72.38,18.21 72.38,18.85 Q2.1
GND  (via drill 0.3)  (5 unrouted)
  Top 0.127: U3.1 7.61,55.55 7.61,70.54 6.34,71.81 6.34,78.54 1.89,82.98 J1.G3 1.89,83.11 1.89,89.84 5.45,93.4 | U3.29_5 13.58,62.79 14.59,62.79 U3.29_8 | U3.29_5 13.45,62.92 13.45,63.93 U3.29_6 13.58,64.06 14.59,64.06 U3.29_9 14.72,64.06 v15.74,64.06 | U3.29_7 14.59,61.65 13.58,61.65 U3.29_4 13.45,61.65 12.31,61.65 | 12.31,62.79 12.31,61.65 | 12.31,61.65 U3.29_1 | 12.31,62.79 U3.29_5 | 12.31,62.79 U3.29_2 12.31,62.92 12.31,63.93 U3.29_3 12.18,64.06 12.18,66.73 7.73,71.17 7.73,72.95 U3.28 7.73,73.08 7.73,77.65 15.99,85.9 J1.G1 15.99,86.03 15.99,87.17 15.23,87.94 15.23,90.86 15.99,91.62 J1.G2 16.12,91.75 15.23,92.63 15.23,93.27 | 5.45,93.4 5.07,93.78 4.94,93.78 2.91,95.81 2.91,96.06 J1.G4 | 15.23,93.27 15.23,95.56 15.61,95.94 15.61,99.87 C9.2 15.74,100 v16.5,100 | 15.23,93.27 5.58,93.27 J1.P6 5.45,93.4 | U$3.1 22.47,108.51 25.9,108.51 U$3.2 26.02,108.38 26.02,108 v26.4,107.62 | 28.31,107.37 28.31,98.35 29.83,96.83 TP4.TP | 28.31,107.37 28.31,107.49 C23.2 | 28.31,107.37 v27.42,107.37 | 28.31,107.37 C23.2 | TP5.TP 75.04,108.89 69.46,108.89 C22.2 69.33,108.76 66.41,108.76 66.28,108.64 U$1.2 66.15,108.51 62.73,108.51 U$1.1 62.6,108.64 62.09,109.14 59.17,109.14 C24.2 59.04,109.14 57.65,109.14 55.74,107.24 55.74,107.11 55.49,106.86 52.82,106.86 51.3,108.38 U$2.2 51.17,108.51 47.74,108.51 U$2.1 47.61,108.38 47.1,107.87 44.44,107.87 | 44.44,107.87 43.55,107.87 C21.2 43.42,107.75 43.29,107.62 28.31,107.62 C23.2 | 44.44,107.87 44.44,94.54 IC2.3 | 169.15,47.17 164.55,47.17 J4.MP3 164.68,47.3 165.21,47.3 164.67,47.84 J4.A1 164.67,48.92 164.68,48.9 | 168.39,47.17 J4.MP1 169.28,51.01
  Top 0.127: 164.83,56.95 164.83,55.95 J4.A12 J4.B1 163.8,55.16 163.31,55.16 162.43,54.28 156.58,54.28 R17.2 156.45,54.15 156.2,54.15 152.01,49.96 151.75,49.96 D12.5 151.63,49.96 141.08,49.96 140.2,50.85 139.94,50.85 U1.6 139.81,50.98 138.8,50.98 | 165.34,57.46 168.3,57.46 J4.MP2 169.28,54.65 169.28,47.3 | 164.56,57.46 J4.MP4 164.54,56.04 164.83,55.74 | C1.2 157.09,9.58 156.83,9.32 155.56,9.32 C2.2 155.44,9.32 155.44,12.37 154.67,13.13 U4.1 154.55,13.26 154.55,14.53 153.91,15.16 153.91,16.05 U4.7 153.78,16.18 153.78,16.69 | 152.64,17.58 152.26,17.2 152.26,16.18 U4.5 | 152.64,17.58 152.9,17.58 153.78,16.69 | 153.78,16.69 154.8,17.7 165.37,17.7 J2.1 | 114.92,45.52 116.07,46.66 C2_BAT.2 116.19,46.66 121.53,46.66 122.67,45.52 C1_BAT.2 122.8,45.39 123.56,44.63 123.56,44.37 | 114.92,45.52 113.53,44.12 108.83,44.12 R2_BAT.1 | 114.92,45.52 114.29,46.15 114.29,47.3 115.43,48.44 115.43,50.98 115.3,51.11 114.29,51.11 113.4,50.22 109.59,50.22 C1_BAT1.2 109.46,50.22 108.83,50.85 98.41,50.85 96,48.44 C5.2 95.87,48.31 91.68,44.12 | 138.8,50.98 138.93,51.11 U1.9 | 138.8,50.98 138.29,50.47 137.91,50.47 U1.4 137.78,50.34 134.1,46.66 129.4,46.66 128.89,47.17 | U1.9 138.8,51.23 138.16,51.87 137.91,51.87 U1.1 137.78,51.99 134.73,55.04 131.18,55.04 C1_BAT2.2 | 138.8,50.98 U1.9 | R16.1 150.61,45.26 148.7,43.36 148.7,40.56 C19.2 148.58,40.44 147.94,39.8 | 145.78,40.95 145.78,45.26 C20.2 | 145.78,40.95 146.93,39.8 147.94,39.8 | 132.58,41.07 126.99,41.07 C18.- 126.86,41.07 126.86,42.6 125.08,44.37 125.08,44.63 127.37,46.91 128.64,46.91 128.89,47.17 | 132.58,41.07 133.21,41.07 R1_PWRUSB.1
  Top 0.127: 123.56,44.37 123.56,41.83 122.8,41.07 121.78,41.07 IC1.2 | 123.56,44.37 127.5,48.31 128,48.31 MCP73831.2 128.13,48.31 128.38,48.31 128.89,47.8 128.89,47.17 | 145.78,40.95 135.62,40.95 133.85,39.17 132.7,39.17 132.58,39.29 132.58,41.07 | 152.64,17.58 152.64,33.83 147.94,38.53 147.94,39.8 | 34.91,64.19 32.88,64.19 U2.4 32.75,64.06 v31.99,64.06 | 34.91,64.19 36.69,65.96 U2.9 | 42.91,32.44 46.22,32.44 D8.1 | 42.91,32.44 42.28,32.44 D7.1 42.15,32.31 42.02,32.18 v42.02,31.55 | v38.6,31.93 38.6,32.82 D9.1 | 51.17,55.68 50.03,56.82 44.69,56.82 44.06,56.19 44.06,56.06 43.68,55.68 D6.1 43.55,55.55 | 51.17,55.68 52.06,56.57 53.96,56.57 54.85,55.68 58.79,55.68 D4.1 58.92,55.68 59.17,55.68 59.8,56.31 82.16,56.31 84.95,53.52 84.95,53.26 U5.13 85.08,53.14 85.08,49.45 C3.2 85.2,49.33 85.46,49.33 90.67,44.12 91.68,44.12 | 51.17,55.68 D5.1 | 42.91,32.44 42.91,54.92 43.55,55.55 | 43.55,55.55 34.91,64.19 | 91.68,44.12 91.68,37.01 | 91.68,37.01 91.68,36.37 D3.1 | C12.2 87.24,21.39 86.35,21.39 C13.2 86.22,21.39 85.33,21.39 C14.2 85.2,21.26 84.32,21.26 C15.2 84.19,21.26 83.3,21.26 C16.2 83.17,21.26 82.28,21.26 C17.2 82.16,21.26 82.16,23.17 81.27,24.05 81.27,30.4 82.54,31.67 83.68,31.67 87.87,27.48 87.87,24.05 89.52,22.4 89.52,21.64 C10.2 | C10.2 89.65,21.64 91.05,21.64 C6.2 91.17,21.51 92.7,21.51 C8.2 | 85.71,14.66 83.68,12.62 81.27,12.62 J3.MP2 81.14,12.62 80.51,12.62 75.3,17.83 73.14,17.83 72.76,18.21 72.76,19.48 72.63,19.61 72,19.61 71.87,19.48 71.87,18.21 75.68,14.4 | 85.71,14.66 85.71,14.91 J3.17 85.71,14.66 | 85.71,14.66 86.98,13.39 89.01,13.39 90.16,14.53 90.16,14.91 J3.8 90.16,15.04 90.16,16.56 88.89,17.83 88.89,20.88 89.52,21.51 C10.2
  Top 0.127: 75.55,11.61 75.55,12.5 75.68,12.62 SJ1.1 75.68,12.75 75.68,14.4 | 75.55,11.61 75.55,10.85 R2.1 | 75.68,14.4 75.68,14.53 C11.2 75.68,14.4 | 96.13,26.85 95.49,26.85 94.86,26.21 R5.1 94.73,26.21 93.59,27.36 90.54,27.36 C7.2 | 96.13,26.85 96.63,26.85 96.76,26.72 96.76,25.58 94.73,23.55 94.73,12.62 J3.MP1 94.6,12.5 93.71,11.61 75.55,11.61 | 91.68,37.01 95.75,37.01 96.13,36.63 96.13,26.85 | J4.B12 164.37,49.22 164.67,48.91
  Bottom 0.127: v27.42,107.37 27.17,107.62 v26.4,107.62 18.78,100 v16.5,100 | v38.6,31.93 41.64,31.93 v42.02,31.55 | v31.99,64.06 v15.74,64.06
GPIO8
  Top 0.127: R1.1 22.59,48.44 22.59,51.87 19.04,55.42 U3.10
INT_RTC  (via drill 0.3)
  Top 0.127: v82.28,65.33 78.35,69.27 R15.1 | v85.2,63.93 86.22,62.92 86.22,62.54 U5.3 | v26.53,68.5 16.62,58.6 U3.8 | v79.24,71.04 79.24,101.65 TP15.TP
  Bottom 0.127: v82.28,65.33 83.81,65.33 v85.2,63.93 85.84,63.93 88.76,66.85 88.76,67.11 86.86,69.01 79.24,69.01 | v26.53,68.5 27.04,69.01 79.24,69.01 | 79.24,69.01 v79.24,71.04
IO/BOOT
  Top 0.127: R19.1 54.98,107.62 53.71,107.62 51.3,110.03 U$2.3 51.17,110.03 47.74,110.03 U$2.4 47.61,109.91 46.6,108.89 28.31,108.89 C23.1 28.18,108.76 24.24,104.83 24.24,73.08 U3.15
IO/CHANGE  (via drill 0.3)
  Top 0.127: v57.14,108 59.04,108 C24.1 | v27.04,109.02 26.02,110.03 U$3.3 25.9,110.03 22.47,110.03 U$3.4 22.34,110.03 20.43,110.03 | 20.43,110.03 19.8,110.03 R21.1 | 20.43,110.03 20.43,83.74 14.08,77.39 14.08,73.08 U3.23
  Bottom 0.127: v57.14,108 28.05,108 v27.04,109.02
MISO  (via drill 0.3)
  Top 0.127: 6.72,98.6 6.72,104.7 5.83,105.59 TP6.TP | 6.72,98.6 6.72,95.05 6.21,94.54 5.83,94.54 J1.P7 | 6.72,98.6 14.34,98.6 14.97,99.24 14.97,100.38 15.23,100.64 16.5,100.64 17.01,100.13 17.01,85.01 16.88,84.89 15.61,84.89 9,78.28 9,73.08 U3.27 9,72.95 9,72.44 v9.77,71.68 | 43.68,54.41 43.68,42.6 44.06,42.22 44.18,42.22 44.56,41.83 R12.1 | 43.68,54.41 44.31,55.04 44.31,56.06 44.82,56.57 48.88,56.57 50.66,54.79 51.68,54.79 51.93,55.04 51.93,56.06 52.18,56.31 53.84,56.31 55.36,54.79 59.42,54.79 60.19,55.55 D4.2 | v32.88,65.96 32.88,66.6 U2.2 | 43.68,54.41 v43.42,54.66
  Bottom 0.127: v43.42,54.66 32.88,65.2 v32.88,65.96 15.48,65.96 v9.77,71.68
MOSI  (via drill 0.3)
  Top 0.127: v86.86,15.8 87.11,15.55 87.11,15.04 J3.14 | v55.11,44.5 55.11,45.39 R11.1 54.98,45.52 52.69,47.8 v52.69,54.66 52.69,55.55 D5.2 | v40.63,59.11 40.63,64.06 U2.5 | v16.12,54.41 15.35,55.17 15.35,55.42 U3.7 | v9,87.43 6.46,89.97 5.83,89.97 J1.P3 | v53.2,66.47 53.2,69.39 59.3,75.49 TP7.TP
  Bottom 0.127: v86.86,15.8 76.44,15.8 55.11,37.14 v55.11,44.5 55.11,44.63 44.56,55.17 | 44.56,55.17 v40.63,59.11 | 44.56,55.17 43.55,54.15 43.29,54.15 42.41,55.04 33.26,55.04 32.63,54.41 v16.12,54.41 9,61.52 v9,87.43 | v53.2,66.47 53.2,66.22 52.69,65.71 v52.69,54.66
N$1
  Top 0.127: C4.1 78.85,34.85 79.24,34.47 79.24,34.34 81.39,32.18 84.06,32.18 87.24,29.01 95.75,29.01 95.87,29.13 95.87,32.82 95.36,33.33 D2.1 95.24,33.45 95.11,33.58 95.11,36.25 D3.2
N$2
  Top 0.127: R1_BAT.2 121.78,33.83 121.78,39.04 124.83,42.09 124.83,44.76 127.5,47.42 128,47.42 MCP73831.1
N$3
  Top 0.127: CHG_LED.C 114.67,43.23 114.92,42.98 115.05,42.98 118.22,39.8 118.22,35.99 120.38,33.83 R1_BAT.1
N$4  (via drill 0.3)
  Top 0.127: 109.21,49.45 108.57,50.09 108.32,50.09 C1_BAT1.1 | 109.21,49.45 113.91,49.45 114.8,50.34 D11.1 | 121.02,41.45 121.02,40.56 121.15,40.44 121.27,40.44 121.65,40.06 IC1.1 | 121.02,41.45 121.4,41.83 121.65,41.83 IC1.3 121.78,41.96 v123.05,41.96 | v125.59,44.5 125.59,44.76 126.86,46.03 133.08,46.03 133.72,45.39 134.48,45.39 Q3.2 | 109.21,49.45 109.21,45.77 108.06,44.63 108.06,43.61 108.19,43.49 111.87,43.49 114.16,41.2 115.18,41.2 115.3,41.33 115.3,42.34 114.92,42.72 114.16,42.72 114.03,42.85 114.03,43.87 114.16,43.99 118.48,43.99 121.02,41.45
  Bottom 0.127: v123.05,41.96 v125.59,44.5
N$5  (via drill 0.3)
  Top 0.127: v110.86,42.85 108.83,42.85 R2_BAT.2 | v115.56,47.55 125.34,47.55 MCP73831.5
  Bottom 0.127: v115.56,47.55 v110.86,42.85
N$6
  Top 0.127: J3.24 82.28,15.04 82.28,19.86 C17.1
N$7
  Top 0.127: IC2.5 41.64,92.63 41.64,93.52 43.42,95.3 43.42,106.48 C21.1
N$8
  Top 0.127: J3.22 83.3,15.04 83.3,18.85 84.32,19.86 C15.1
N$10
  Top 0.127: J3.20 84.32,15.04 84.32,17.96 86.35,19.99 C13.1
N$11
  Top 0.127: R13.1 95.36,65.96 88.63,65.96 87.24,67.36 D10.1
N$12
  Top 0.127: J3.19 84.82,15.04 84.82,17.45 87.24,19.86 87.24,20.12 C12.1
N$13  (via drill 0.3)
  Top 0.127: v79.36,14.4 84.95,14.4 85.2,14.66 85.2,14.91 J3.18 | v77.71,14.4 77.2,14.4 77.08,14.53 C11.1
  Bottom 0.127: v77.71,14.4 v79.36,14.4
N$20
  Top 0.127: J3.5 91.68,15.04 91.68,19.74 91.17,20.24 C6.1
N$21
  Top 0.127: J3.4 92.32,15.04 92.32,19.74 92.7,20.12 C8.1
N$26
  Top 0.127: R16.2 152.01,45.39 157.84,45.39 163.31,50.86 163.8,50.86 J4.A5
N$27
  Top 0.127: C20.1 145.78,46.53 147.31,45.01 147.31,40.56 C19.1
N$28
  Top 0.127: J4.B5 163.8,53.86 157.44,53.86 R17.1
PREVGH
  Top 0.127: J3.21 83.81,15.04 83.81,18.34 85.2,19.74 85.2,19.99 C14.1 85.2,20.12 85.84,20.75 87.74,20.75 88,21.01 88,23.55 83.17,28.37 83.17,30.91 D1.1
PREVGL
  Top 0.127: J3.23 82.79,15.04 82.79,19.36 83.3,19.86 C16.1 83.3,19.99 82.79,20.5 81.65,20.5 79.24,18.09 73.27,18.09 73.14,18.21 73.14,19.48 80.38,26.72 80.38,31.55 78.22,33.71 78.22,35.48 78.47,35.74 79.24,35.74 79.49,35.48 79.49,34.47 79.74,34.21 82.41,34.21 86.73,29.9 95.24,29.9 D2.2
RESE
  Top 0.127: J3.3 92.82,15.04 92.82,19.1 93.71,19.99 93.71,23.04 89.78,26.98 89.78,27.86 88.89,28.75 86.98,28.75 83.81,31.93 82.41,31.93 80.63,30.15 80.63,21.26 78.73,19.36 R6.2 78.6,19.23 77.97,18.59 76.95,18.59 76.7,18.85 73.65,18.85 Q2.2
RESET  (via drill 0.3)
  Top 0.127: U$1.4 62.73,110.03 66.15,110.03 U$1.3 66.28,110.03 69.33,110.03 C22.1 69.46,110.16 75.68,110.16 76.31,109.53 76.31,107.11 65.14,95.94 R20.1 65.01,95.81 61.84,92.63 44.44,92.63 IC2.1 44.31,92.63 v43.55,92.63 | R2.2 74.41,10.85 74.41,12.5 74.28,12.62 SJ1.2 74.16,12.75 v58.53,28.37 | v10.15,67.74 10.15,55.55 U3.3 10.27,55.42 10.27,55.17 v11.04,54.41
  Bottom 0.127: v10.15,67.74 10.15,70.66 9.26,71.55 9.26,86.92 14.97,92.63 v43.55,92.63 | v58.53,28.37 37.07,28.37 v11.04,54.41
RTC_RST  (via drill 0.3)
  Top 0.127: v27.17,68.5 22.97,72.7 22.97,72.95 U3.16 | v49.52,68 49.77,68 53.96,63.81 84.06,63.81 84.95,62.92 84.95,62.54 U5.4
  Bottom 0.127: v27.17,68.5 33.26,68.5 34.02,67.74 49.26,67.74 v49.52,68
RX
  Top 0.127: U3.24 12.81,73.08 12.81,77.9 13.07,78.16 TP2.TP
SCK  (via drill 0.3)
  Top 0.127: v15.1,92.13 5.83,92.13 J1.P5 | v32.75,92.13 34.53,90.35 TP8.TP | v40.63,64.69 40.63,65.33 U2.6 | v45.96,56.06 45.45,56.06 45.07,55.68 D6.2 44.95,55.55 44.95,44.63 43.93,43.61 43.93,42.72 44.18,42.47 47.99,42.47 48.5,41.96 R10.1 48.63,41.83 53.2,37.26 | v85.71,16.82 86.47,16.82 87.62,15.67 87.62,15.04 J3.13 | 53.2,37.26 v55.61,37.26 | 53.2,37.26 53.2,34.09 47.36,28.25 41.64,28.25 41.26,28.63 41.26,32.82 26.4,47.68 21.7,47.68 14.59,54.79 14.59,54.92 14.08,55.42 U3.6 14.08,55.8 16.24,57.96 16.24,64.19 10.4,70.03 v10.4,71.68
  Bottom 0.127: v32.75,92.13 v15.1,92.13 15.1,79.05 10.4,74.35 v10.4,71.68 | v40.63,64.69 40.63,61.39 v45.96,56.06 | v85.71,16.82 76.06,16.82 v55.61,37.26
SCL  (via drill 0.3)
  Top 0.127: R3.1 151.75,9.2 151.75,12.75 152.13,13.13 U4.4 152.26,13.26 152.26,13.77 v152.64,14.15 | v141.21,50.47 140.32,51.36 139.94,51.36 U1.7 | v21.58,69.01 17.89,72.7 17.89,72.95 U3.20 | v88.76,58.47 88.76,53.26 U5.16 | v165.47,26.21 165.47,20.82 J2.4
  Bottom 0.127: v152.64,14.15 153.15,13.64 153.4,13.64 165.47,25.71 v165.47,26.21 v141.21,50.47 136.39,50.47 128.38,58.47 v88.76,58.47 88.25,58.98 88,58.98 79.49,67.49 26.91,67.49 25.39,69.01 v21.58,69.01
SDA  (via drill 0.3)
  Top 0.127: R4.1 153.66,7.67 152.51,7.67 152.13,7.29 151.12,7.29 150.86,7.54 150.86,8.31 151.12,8.56 152.13,8.56 153.02,9.45 153.02,13.13 U4.3 153.15,13.26 153.28,13.39 v153.28,14.15 | 132.83,59.36 126.1,66.09 96.76,66.09 95.87,65.2 94.86,65.2 v88.13,58.47 87.62,57.96 87.62,53.26 U5.15 | 132.83,59.36 139.81,52.38 139.81,51.99 U1.8 | v23.36,68.5 19.16,72.7 19.16,72.95 U3.19 | v130.16,56.06 130.16,56.69 132.83,59.36 | v158.86,19.74 165.4,19.74 J2.3
  Bottom 0.127: v153.28,14.15 v158.86,19.74 158.86,27.36 v130.16,56.06 | v23.36,68.5 25.51,68.5 26.78,67.23 79.36,67.23 v88.13,58.47
SRC
  Top 0.127: 77.97,32.56 77.97,35.61 78.35,35.99 79.36,35.99 80.12,35.23 80.12,34.98 C4.2 | 77.97,32.56 79.49,31.04 D1.2 | 72.89,29.13 72.89,21.01 Q2.3 | 72.89,29.13 72.12,29.9 L1.1 | 77.97,32.56 76.31,32.56 72.89,29.13
SS_SD
  Top 0.127: D9.2 38.6,34.34 39.23,33.71 39.23,27.99 38.09,26.85 R7.1 37.96,26.85 21.45,26.85 11.54,36.75 11.54,55.42 U3.4 11.42,55.55 11.42,67.11 6.72,71.81 6.72,88.32 6.21,88.82 J1.P2
TX
  Top 0.127: U3.25 11.42,73.08 11.42,77.52 10.78,78.16 TP1.TP
USB_D+  (via drill 0.3)
  Top 0.127: v88.25,66.98 125.59,66.98 141.72,50.85 151.63,50.85 D12.4 | v34.15,68.25 33.01,67.11 32.25,67.11 24.24,59.11 U3.14
  Bottom 0.127: v88.25,66.98 80.38,66.98 78.85,68.5 34.4,68.5 v34.15,68.25
USB_D-  (via drill 0.3)
  Top 0.127: v133.21,42.85 139.18,48.82 151.63,48.82 D12.6 | v33.39,54.53 23.74,54.53 22.85,55.42 U3.13
  Bottom 0.127: v133.21,42.85 131.31,42.85 103.75,15.29 72.63,15.29 v33.39,54.53
VBAT
  Top 0.127: U1.2 137.91,51.36 137.91,50.98 U1.3 137.78,50.85 137.53,50.85 134.1,47.42 133.59,47.42 Q3.3 133.46,47.42 130.29,47.42 128.38,49.33 128.13,49.33 MCP73831.3 128,49.33 127.75,49.33 127.24,48.82 126.23,48.82 | 126.23,48.82 116.19,48.82 114.92,47.55 114.92,46.79 C2_BAT.1 | 126.23,48.82 126.23,49.84 125.59,50.47 125.59,64.82 TP3.TP
VBUS  (via drill 0.3)
  Top 0.127: 118.35,44.25 122.67,44.25 C1_BAT.1 | 118.35,44.25 114.03,44.25 113.78,43.99 113.78,42.72 114.54,41.96 CHG_LED.A | MCP73831.4 125.34,49.45 124.45,50.34 v118.35,50.34 116.95,50.34 D11.2 116.83,50.47 116.07,51.23 116.07,64.19 TP14.TP | v118.35,46.15 118.35,44.25 | 133.97,41.45 132.7,42.72 132.7,45.26 Q3.1 132.58,45.26 v126.73,45.26 | 133.97,41.45 133.97,40.44 133.34,39.8 R1_PWRUSB.2 | 151.37,47.17 151.37,38.02 152.9,36.5 R18.2 | 151.37,47.17 151.37,47.3 153.91,49.84 154.17,49.84 D12.2 | 133.97,41.45 139.43,41.45 145.15,47.17 151.37,47.17
  Bottom 0.127: v118.35,50.34 v118.35,46.15 125.84,46.15 v126.73,45.26
VRTC
  Top 0.127: 86.35,51.36 86.35,53.14 U5.14 | 86.35,51.36 86.35,49.45 C3.1 | 95.49,51.36 95.49,50.98 95.87,50.6 C5.1 | 95.49,51.36 95.49,64.57 R13.2 | 95.49,51.36 86.35,51.36
VUSB
  Top 0.127: R18.1 157.47,36.5 157.47,43.71 163.31,49.56 163.8,49.56 J4.A4 J4.B9 164.1,50.09 165.34,50.09 165.85,50.6 165.85,54.03 165.34,54.53 164.1,54.53 J4.B4 J4.A9